# Altium PCB PCI long card 5V - 32 BIT.PCBDOC (part 2 of 2)
Units mil, origin at the board's own origin, x right, y up, seen from the top; angles counter-clockwise.
Board outline 12283 x 4200 mil, 10 copper layers (TopLayer, MidLayer1, MidLayer2, MidLayer3, MidLayer4, MidLayer5, MidLayer6, MidLayer7, MidLayer8, BottomLayer); 280 components, 352 nets, 1028 pads, 0 vias.
Unrouted connection lines stored in the file: 551.
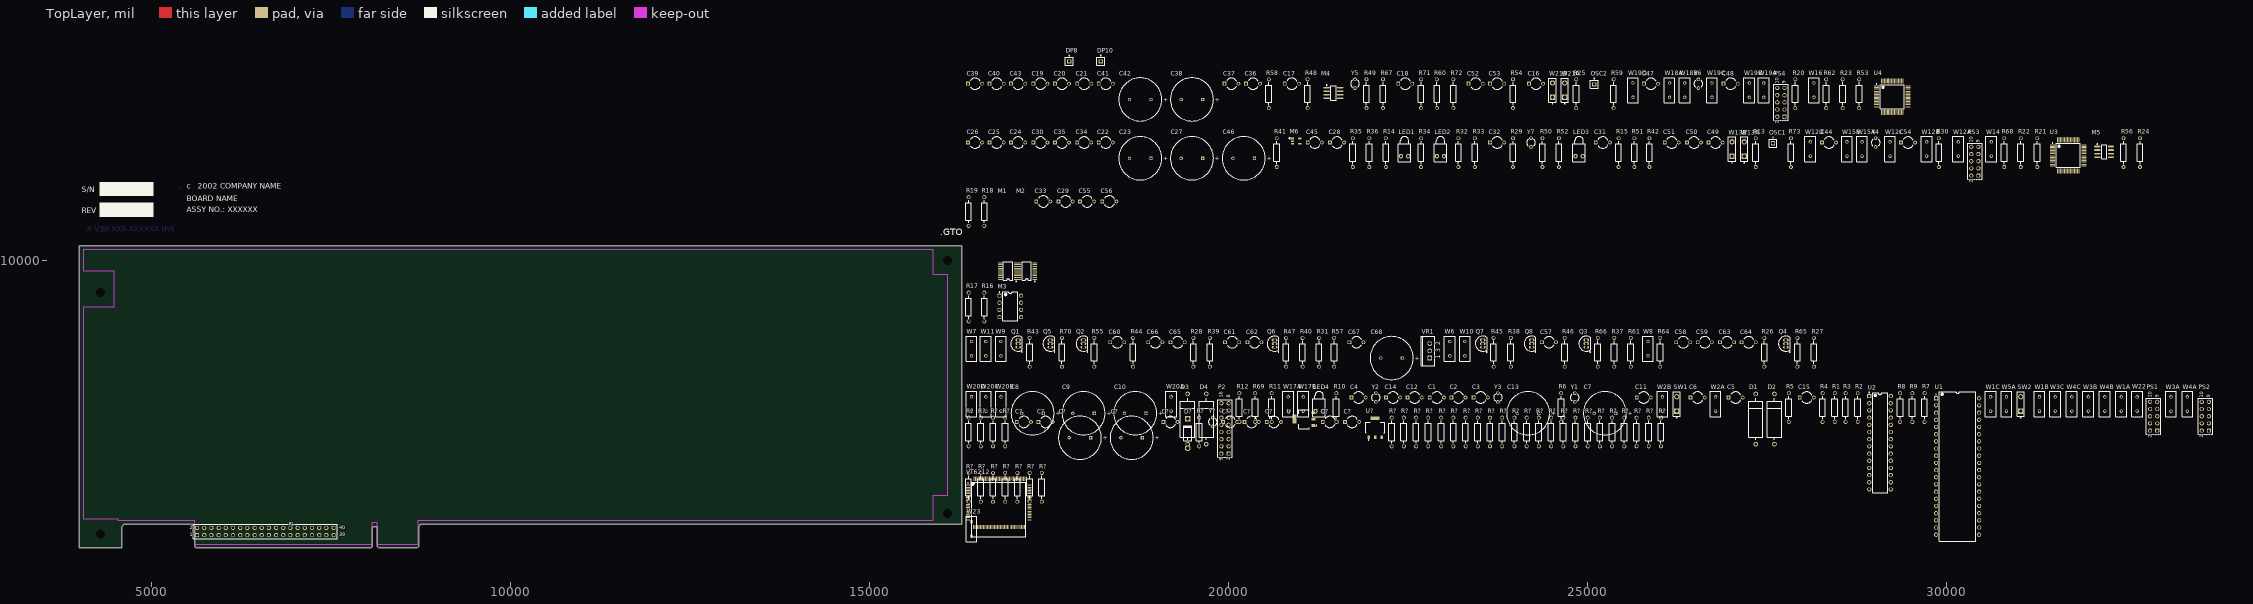
[diagram p0: TopLayer view]

## Nets (pads, with @x,y where several pads share a name; then routed paths per layer and width w, separated by ;. In a path a pad name is that pad's centre, name@x,y a point inside that pad or via, vN(x,y) a via of type N, cw(c..) or ccw(c..) an arc to the next point about the centre after c; other vN are vias at no path point) (continued)
pads on no net: DP8.1 DP10.1 M4.5 M5.5 PS1.3 PS1.4 PS1.6 PS1.8 PS2.3 PS2.4 PS2.5 PS2.6 PS2.8 PS3.1 PS3.4 PS3.7 PS4.1 PS4.4 PS4.7 Q1.1 Q4.1 Q6.1 Q7.1 R?.2@25340,7810 R?.2@25850,7810 R?.2@26020,7810 U1.1 U1.2 U1.3 U1.4 U1.18 U1.19 U1.27 U1.33 U1.34 U1.35 U2.25 U3.1 U3.12 U3.13 U3.18 U3.19 U3.32 U3.48 U3.63 U3.64 U4.1 U4.12 U4.13 U4.18 U4.19 U4.32 U4.48 U4.54 U4.63 U4.64 U.4 U?.4 VT6212.1 VT6212.2 VT6212.3 VT6212.4 VT6212.5 VT6212.6 VT6212.7 VT6212.8 VT6212.9 VT6212.10 VT6212.11 VT6212.12 VT6212.13 VT6212.14 VT6212.15 VT6212.16 VT6212.17 VT6212.18 VT6212.19 VT6212.20 VT6212.21 VT6212.22 VT6212.23 VT6212.24 VT6212.25 VT6212.26 VT6212.27 VT6212.28 VT6212.29 VT6212.30 VT6212.31 VT6212.32 VT6212.33 VT6212.34 VT6212.35 VT6212.36 VT6212.37 VT6212.38 VT6212.39 VT6212.40 VT6212.41 VT6212.42 VT6212.43 VT6212.44 VT6212.45 VT6212.46 VT6212.47 VT6212.48 VT6212.49 VT6212.50 VT6212.51 VT6212.52 VT6212.53 VT6212.54 VT6212.55 VT6212.56 VT6212.57 VT6212.58 VT6212.59 VT6212.60 VT6212.61 VT6212.62 VT6212.63 VT6212.64 VT6212.65 VT6212.66 VT6212.67 VT6212.68 VT6212.69 VT6212.70 VT6212.71 VT6212.72 VT6212.73 VT6212.74 VT6212.75 VT6212.76 VT6212.77 VT6212.78 VT6212.79 VT6212.80 VT6212.81 VT6212.82 VT6212.83 VT6212.84 VT6212.85 VT6212.86 VT6212.87 VT6212.88 VT6212.89 VT6212.90 VT6212.91 VT6212.92 VT6212.93 VT6212.94 VT6212.95 VT6212.96 VT6212.98 VT6212.99 VT6212.100 VT6212.101 VT6212.102 VT6212.103 VT6212.105 VT6212.106 VT6212.107 VT6212.108 VT6212.109 VT6212.110 VT6212.111 VT6212.112 VT6212.113 VT6212.114 VT6212.115 VT6212.116 VT6212.117 VT6212.118 VT6212.119 VT6212.120 VT6212.121 VT6212.122 VT6212.123 VT6212.124 VT6212.125 VT6212.126 VT6212.127 VT6212.128 W8.2 W9.2

## Keep-outs
KeepOutLayer:
  lines w8: 4063,6405 4538,6405 4538,6380 5603,6380 5603,6045 8078,6045 8078,6355 8148,6355 8148,6045 8718,6045 8718,6380 15888,6380 15888,6730 16088,6730 16088,9805 15888,9805 15888,10155 4063,10155 4063,9855 4488,9855 4488,9355 4063,9355 4063,6405

## Other copper
TopLayer:
  text ".GTL" at 15983,10350 h90
MidLayer1:
  text ".G1" at 15983,10350 h90
MidLayer2:
  text ".G2" at 15983,10350 h90
MidLayer3:
  text ".G3" at 15983,10350 h90
MidLayer4:
  text ".G4" at 15983,10350 h90
MidLayer5:
  text ".G5" at 15983,10350 h90
MidLayer6:
  text ".G6" at 15983,10350 h90
MidLayer7:
  text ".G7" at 15983,10350 h90
MidLayer8:
  text ".G8" at 15983,10350 h90
BottomLayer:
  text "P/N XXXXXX-XXX REV A" at 5320,10400 h75
  text ".GBL" at 15983,10350 h90

## Silkscreen, mask and mechanical layers (free items; w line width, h text height)
TopOverlay:
  rectangle: 4281,10603 5031,10803
  rectangle: 4281,10893 5031,11093
  lines w10: 5392.59,10995.97 ccw(c5441,11035.5) 5392.71,10995.83
  text "C" at 5496,10998 h60
  text "2002 COMPANY NAME" at 5646,10998 h75
  text "S/N" at 4031,10950.5 h75
  text "BOARD NAME" at 5496,10823 h75
  text "ASSY NO.: XXXXXX" at 5496,10673 h75
  text "REV" at 4031,10653 h75
  text ".GTO" at 15983,10350 h90
TopPaste:
  text ".GTP" at 15983,10350 h90
BottomPaste:
  text ".GBP" at 15983,10350 h90
TopSolder:
  rectangle: 5583,5980 8743,6280
  text ".GTS" at 15983,10350 h90
BottomSolder:
  rectangle: 5583,5980 8743,6280
  text ".GBS" at 15983,10350 h90
Mechanical1:
  the board outline again, w20
Mechanical4:
  circle w10: c5578.67,6044.32 r100
  lines w8: 16938,7230 17113,7230 17113,6935 ; 17038,6730 17438,6730 ; 17038,6930 17388,6930 ; 17113,6430 17113,6725 ; 17200.5,6405 17495.5,6405 ; 17275.5,7955 17583,7955 ; 17500.5,6330 17500.5,6680 ; 17525.5,6330 17525.5,6680 ; 17588,7730 17588,8030 ; 17613,6980 17888,7980 ; 17825.5,6405 17530.5,6405 ; 18157.72,7800.07 17868.77,7905.24 ; 17113,6725 17138,6575 17088,6575 17113,6725 ; 17113,6935 17138,7085 17088,7085 17113,6935 ; 17495.5,6405 17345.5,6430 17345.5,6380 17495.5,6405 ; 17530.5,6405 17680.5,6430 17680.5,6380 17530.5,6405 ; 17583,7955 17433,7980 17433,7930 17583,7955 ; 17868.77,7905.24 18018.27,7877.43 18001.17,7830.45 17868.77,7905.24 ; 17093,6580 17133,6580 17113,6715 17093,6580 ; 17093,7080 17133,7080 17113,6945 17093,7080 ; 17098,6585 17128,6585 17113,6705 17098,6585 ; 17098,7075 17128,7075 17113,6955 17098,7075 ; 17103,6590 17113,6695 17123,6590 17103,6590 ; 17103,7070 17123,7070 17113,6965 17103,7070 ; 17108,6595 17113,6685 17118,6595 17108,6595 ; 17108,7065 17118,7065 17113,6975 17108,7065 ; 17350.5,6385 17485.5,6405 17350.5,6425 17350.5,6385 ; 17355.5,6390 17475.5,6405 17355.5,6420 17355.5,6390 ; 17360.5,6395 17465.5,6405 17360.5,6415 17360.5,6395 ; 17365.5,6400 17365.5,6410 17455.5,6405 17365.5,6400 ; 17438,6930 17500.5,6730 17525.5,6730 17588,6930 17588,7692.5 17550.5,7692.5 17550.5,7780 17488,7630 17475.5,7692.5 17438,7692.5 17438,6930 ; 17438,7935 17573,7955 17438,7975 17438,7935 ; 17443,7940 17443,7970 17563,7955 17443,7940 ; 17448,7945 17448,7965 17553,7955 17448,7945 ; 17453,7950 17453,7960 17543,7955 17453,7950 ; 17540.5,6405 17675.5,6425 17675.5,6385 17540.5,6405 ; 17550.5,6405 17670.5,6420 17670.5,6390 17550.5,6405 ; 17560.5,6405 17665.5,6415 17665.5,6395 17560.5,6405 ; 17570.5,6405 17660.5,6410 17660.5,6400 17570.5,6405 ; 17878.16,7901.82 18011.86,7874.45 17998.18,7836.86 17878.16,7901.82 ; 17887.56,7898.4 18005.45,7871.46 17995.19,7843.27 17887.56,7898.4 ; 17896.96,7894.98 17999.05,7868.47 17992.21,7849.67 17896.96,7894.98 ; 17906.36,7891.56 17992.64,7865.48 17989.22,7856.08 17906.36,7891.56
  lines w10: 5436.67,5991.32 5456.67,5996.32 5436.67,6046.32 5436.67,5991.32 ; 5436.87,6046.16 5458.36,6096.79 5438,6100 5436.87,6046.16
  text ".Pcb_File_Name_No_Path" at 14083,10540 h90
  text ".Printout_Name" at 14083,10350 h90
  text "DETAIL A" at 17138,8230 h150
  text "o" at 17813,7992.5 h48
  text "20" at 17650.5,7892.5 h90
  text "0.071" at 16575.5,7180 h90
  text "+.010" at 16588,7030 h75
  text "-.015" at 16588,6880 h75
  text "0.010" at 17888,6355 h90
  text "+.005" at 17888,6205 h75
  text "-.010" at 17888,6055 h75
  text "SEE DETAIL A" at 4690,6000 h75
DrillDrawing:
  text ".LEGEND" at 16583,9125 h90
  text "Drilling Details." at 16583,8975 h90

## Dimensions
4295,5980 to 4000,6000 on Mechanical4
3980,6190 to 4000,6000 on Mechanical4

## Text inside footprints (layer, text, board x,y; h text height)
C7: TopOverlay "+" at 25560.15,7840.99 h59.06
C8: TopOverlay "+" at 17590.15,7840.99 h59.06
C9: TopOverlay "+" at 18300.15,7840.99 h59.06
C10: TopOverlay "+" at 19020.15,7840.99 h59.06
C13: TopOverlay "+" at 24490.15,7840.99 h59.06
C23: TopOverlay "+" at 19090.15,11390.99 h59.06
C27: TopOverlay "+" at 19810.15,11390.99 h59.06
C38: TopOverlay "+" at 19810.15,12210.99 h59.06
C42: TopOverlay "+" at 19090.15,12210.99 h59.06
C46: TopOverlay "+" at 20530.15,11390.99 h59.06
C68: TopOverlay "+" at 22590.15,8610.99 h59.06
C?: TopOverlay "+" at 18970.15,7500.99 h59.06
C?: TopOverlay "+" at 18250.15,7500.99 h59.06
P1: TopOverlay "1" at 5538,6155 h50; TopOverlay "2" at 5538,6255 h50; TopOverlay "40" at 7618,6255 h50; TopOverlay "39" at 7618,6155 h50
P2: TopOverlay "16" at 19920,8090 h50 r90; TopOverlay "8" at 20020,8090 h50 r90; TopOverlay "1" at 20020,7210 h50 r90; TopOverlay "9" at 19920,7210 h50 r90
PS1: TopOverlay "10" at 32850,8090 h50 r90; TopOverlay "9" at 32950,8090 h50 r90; TopOverlay "1" at 32950,7550 h50 r90; TopOverlay "2" at 32850,7530 h50 r90
PS2: TopOverlay "10" at 33570,8090 h50 r90; TopOverlay "9" at 33670,8090 h50 r90; TopOverlay "1" at 33670,7550 h50 r90; TopOverlay "2" at 33570,7530 h50 r90
PS3: TopOverlay "10" at 30360,11640 h50 r90; TopOverlay "9" at 30460,11640 h50 r90; TopOverlay "1" at 30460,11100 h50 r90; TopOverlay "2" at 30360,11080 h50 r90
PS4: TopOverlay "10" at 27660,12460 h50 r90; TopOverlay "9" at 27760,12460 h50 r90; TopOverlay "1" at 27760,11920 h50 r90; TopOverlay "2" at 27660,11900 h50 r90
VR1: TopOverlay "1" at 22944.69,8630.16 h59.06 r90; TopOverlay "2" at 22944.69,8820.32 h59.06 r90; TopOverlay "3" at 22944.69,8720.32 h59.06 r90